# EAGLE board MasterMind_dll (EAGLE 7.1.0)
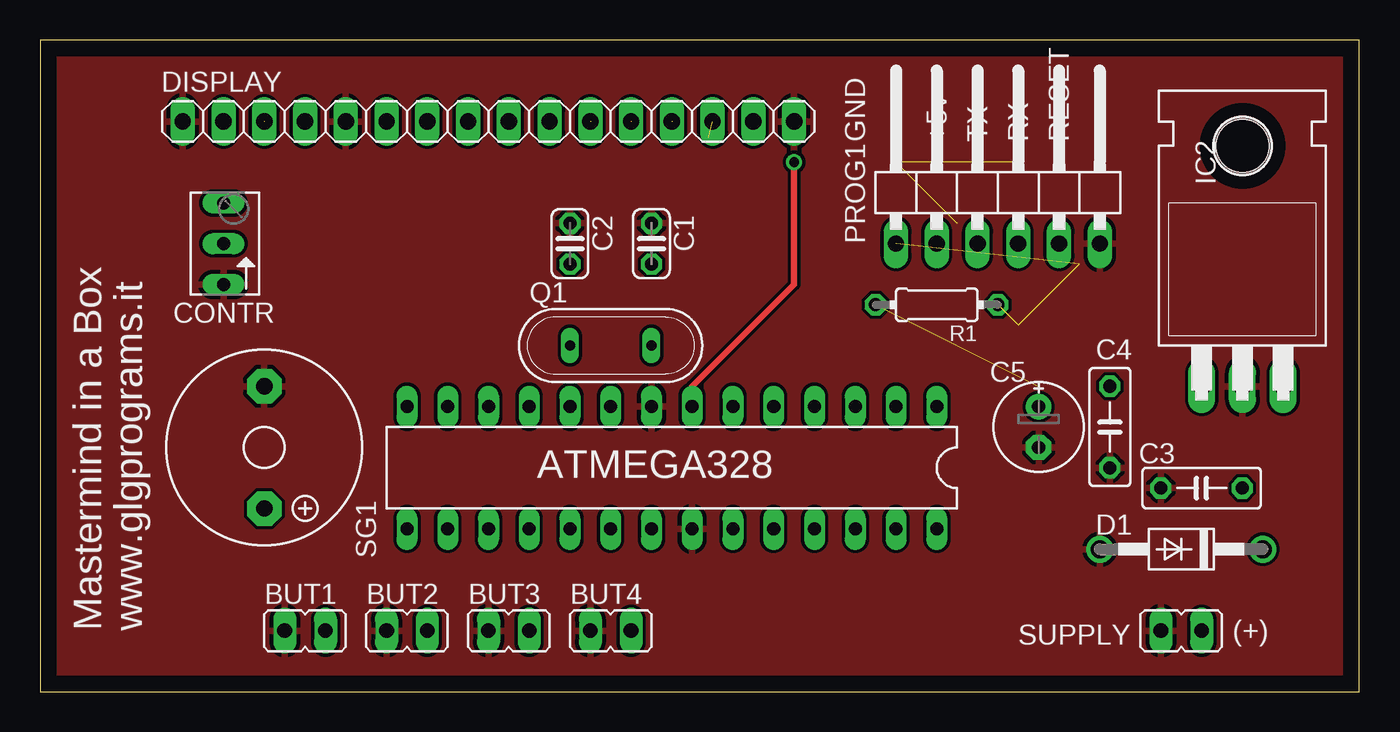
[diagram p0: board, top side]
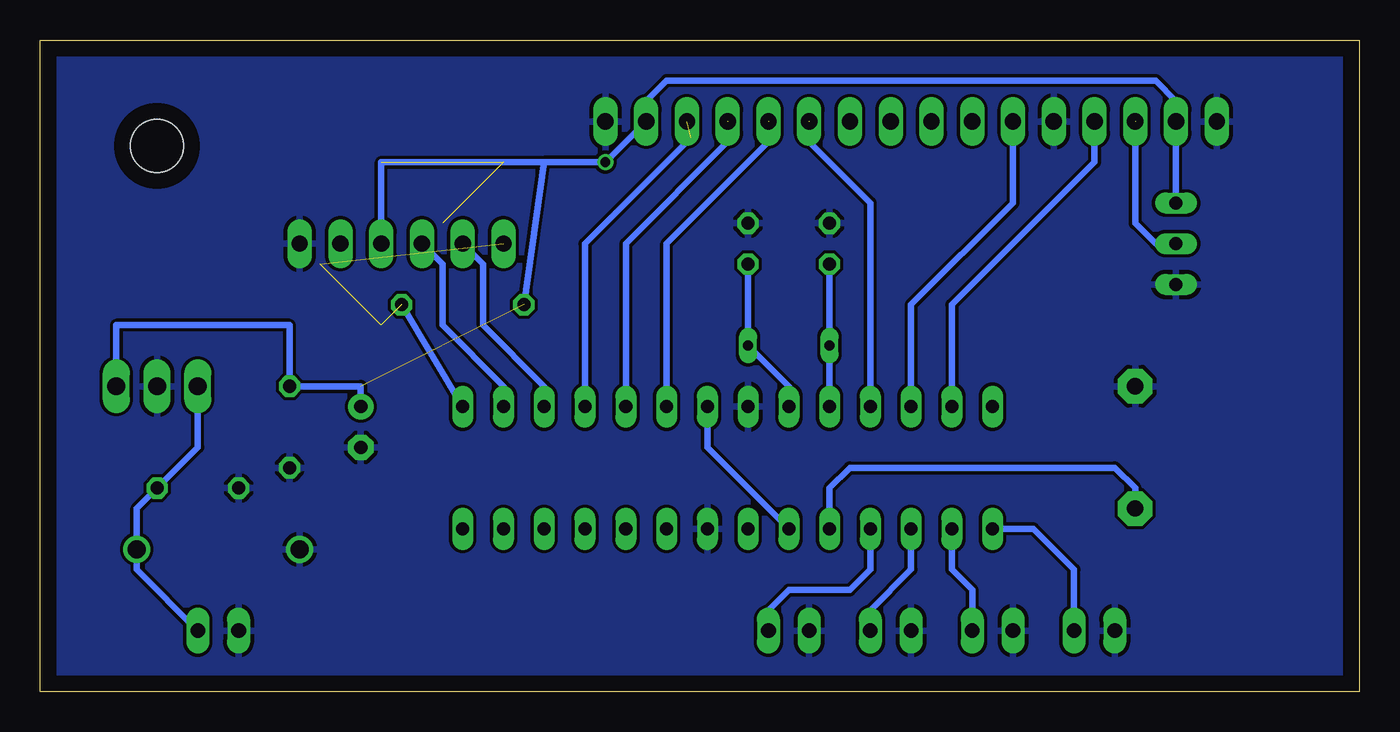
[diagram p1: board, bottom side, seen from below]

Size 82.22 x 40.63 mm. Coordinates in mm from the lower left corner, seen from the top.
Outline: 0,0 82.22,0 82.22,40.63 0,40.63 0,0
Copper layers (1*16): Top 0.035mm / dielectric 1.5mm / Bottom 0.035mm
Design rules "default": minimum track width 10mil, minimum drill 24mil, track to track 8mil, track to pad 8mil, pad to pad 8mil, via to via 8mil, smd to smd 8mil, copper to edge 40mil, drill to drill 8mil, minimum pad ring 10mil, minimum via ring 8mil, stop-mask expansion 4mil, vias tented up to drill 0mil, thermal gap 10mil

## Footprints (pad centres in the part's own frame; a part is rotated, then mirrored left to right if it is on the bottom)
DIL28-3 = drill 0.813 long: 1 -16.51,-3.81; 2 -13.97,-3.81; 3 -11.43,-3.81; 4 -8.89,-3.81; 5 -6.35,-3.81; 6 -3.81,-3.81; 7 -1.27,-3.81; 8 1.27,-3.81; 9 3.81,-3.81; 10 6.35,-3.81; 11 8.89,-3.81; 12 11.43,-3.81; 13 13.97,-3.81; 14 16.51,-3.81; 15 16.51,3.81; 16 13.97,3.81; 17 11.43,3.81; 18 8.89,3.81; 19 6.35,3.81; 20 3.81,3.81; 21 1.27,3.81; 22 -1.27,3.81; 23 -3.81,3.81; 24 -6.35,3.81; 25 -8.89,3.81; 26 -11.43,3.81; 27 -13.97,3.81; 28 -16.51,3.81
JP1 = drill 0.914 long: 1 0,-1.27; 2 0,1.27
C025-024X044 = drill 0.813 octagon: 1 -1.27,0; 2 1.27,0
C050-025X075 = drill 0.813 octagon: 1 -2.54,0; 2 2.54,0
E2,5-6E = drill 0.813 pad 1.575: + -1.27,0 | drill 0.813 pad 1.575 octagon: - 1.27,0
B64Y = drill 0.813 long: A 2.54,0; E -2.54,0; S 0,0
DO41-10 = drill 1.118: A 5.08,0; C -5.08,0
1X16 = drill 1.016 long: 1 -19.05,0; 2 -16.51,0; 3 -13.97,0; 4 -11.43,0; 5 -8.89,0; 6 -6.35,0; 7 -3.81,0; 8 -1.27,0; 9 1.27,0; 10 3.81,0; 11 6.35,0; 12 8.89,0; 13 11.43,0; 14 13.97,0; 15 16.51,0; 16 19.05,0
TO220H = drill 1.118 long: 1 -2.54,-10.16; 2 0,-10.16; 3 2.54,-10.16 | hole 3.302: 0,4.826
1X06/90 = drill 1.016 long: 1 -6.35,-3.81; 2 -3.81,-3.81; 3 -1.27,-3.81; 4 1.27,-3.81; 5 3.81,-3.81; 6 6.35,-3.81
QS = drill 0.61 long: 1 -2.54,0; 2 2.54,0
0204/7 = drill 0.813 octagon: 1 -3.81,0; 2 3.81,0
F/TMB = drill 1.016 pad 2.159 octagon: + 3.81,0; - -3.81,0

## Placement (x,y rotation side)
ATMEGA328  ATMEGA168-20P  [DIL28-3]  39.37,13.97 180 top
BUT1  [JP1]  16.51,3.81 270 top
BUT2  [JP1]  22.86,3.81 270 top
BUT3  [JP1]  29.21,3.81 270 top
BUT4  [JP1]  35.56,3.81 270 top
C1  22p  [C025-024X044]  38.1,27.94 270 top
C2  22p  [C025-024X044]  33.02,27.94 270 top
C3  [C050-025X075]  72.39,12.7 180 top
C4  [C050-025X075]  66.67,16.51 270 top
C5  [E2,5-6E]  62.23,16.51 270 top
CONTR  [B64Y]  11.43,27.94 90 top
D1  1N4004  [DO41-10]  71.12,8.89 180 top
DISPLAY  [1X16]  27.94,35.56 0 top
IC2  7805T  [TO220H]  74.93,29.21 0 top
PROG1  [1X06/90]  59.69,31.75 0 top
Q1  16M  [QS]  35.56,21.59 0 top
R1  [0204/7]  55.88,24.13 180 top
SG1  F/TMB  [F/TMB]  13.97,15.24 270 top
SUPPLY  [JP1]  71.12,3.81 270 top

## Library data of the parts
ATMEGA328 = adafruit
BUT1-BUT4 SUPPLY = jumper
C1 C2 = resistor; SPICEPREFIX: C
C3-C5 = rcl
CONTR = pot
D1 = diode
DISPLAY PROG1 = pinhead
IC2 = linear
Q1 = special
R1 = resistor
SG1 = buzzer; OC_FARNELL: unknown; OC_NEWARK: unknown

## Nets
+5V: ATMEGA328.7 ATMEGA328.20 C4.1 C5.+ CONTR.A DISPLAY.2 DISPLAY.15 IC2.3 PROG1.4 R1.2
CONTR: CONTR.S DISPLAY.3
D4: ATMEGA328.11 DISPLAY.11
D5: ATMEGA328.6 DISPLAY.12
D6: ATMEGA328.5 DISPLAY.13
D7: ATMEGA328.4 DISPLAY.14
ENABLE: ATMEGA328.12 DISPLAY.6
GND: ATMEGA328.8 ATMEGA328.22 BUT1.1 BUT2.1 BUT3.1 BUT4.1 C1.1 C2.1 C3.2 C4.2 C5.- CONTR.E D1.A DISPLAY.1 DISPLAY.5 DISPLAY.16 IC2.2 PROG1.6 SG1.- SUPPLY.1
N$1: ATMEGA328.10 C2.2 Q1.1
N$2: ATMEGA328.9 C1.2 Q1.2
N$3: ATMEGA328.19 SG1.+
N$4: ATMEGA328.18 BUT4.2
N$5: ATMEGA328.17 BUT3.2
N$6: ATMEGA328.16 BUT2.2
N$7: ATMEGA328.15 BUT1.2
N$10: C3.1 D1.C IC2.1 SUPPLY.2
RESET: ATMEGA328.1 PROG1.1 R1.1
RS: ATMEGA328.13 DISPLAY.4
RX: ATMEGA328.3 PROG1.2
TX: ATMEGA328.2 PROG1.3

## Tracks (layer width: path | path; a pad name or v marks a point on that pad's centre or on a via)
+5V  (via drill 0.6)  (3 unrouted)
  Top 0.406: ATMEGA328.7 40.64,19.05 46.99,25.4 v46.99,33.02
  Bottom 0.406: ATMEGA328.20 40.64,15.24 ATMEGA328.7 | 44.2,35.81 DISPLAY.15 | DISPLAY.15 v46.99,33.02 50.8,33.02 | CONTR.A DISPLAY.2 11.43,36.83 12.7,38.1 43.18,38.1 44.45,36.83 DISPLAY.15 | C5.+ 62.23,19.05 C4.1 66.67,22.86 77.47,22.86 IC2.3 | PROG1.4 60.96,33.02 50.8,33.02 | R1.2 50.8,33.02
CONTR  (1 unrouted)
  Bottom 0.406: CONTR.S 12.7,27.94 13.97,29.21 DISPLAY.3
D4  (1 unrouted)
  Bottom 0.406: ATMEGA328.11 30.48,30.48 34.29,34.29 DISPLAY.11
D5  (1 unrouted)
  Bottom 0.406: ATMEGA328.6 43.18,27.94 36.83,34.29 DISPLAY.12
D6  (1 unrouted)
  Bottom 0.406: ATMEGA328.5 45.72,27.94 39.37,34.29 DISPLAY.13
D7  (1 unrouted)
  Bottom 0.406: 41.66,34.54 48.26,27.94 ATMEGA328.4
ENABLE
  Bottom 0.406: ATMEGA328.12 27.94,24.13 21.59,30.48 DISPLAY.6
GND
  pour Top: 0,1.27 0,40.64 82.55,40.64 82.55,0 0,0
  pour Bottom: 0,0 0,40.64 82.55,40.64 82.55,0
N$1
  Bottom 0.406: ATMEGA328.10 Q1.1 C2.2
N$2
  Bottom 0.406: C1.2 Q1.2 35.56,19.05 ATMEGA328.9
N$3
  Bottom 0.406: ATMEGA328.19 33.02,12.7 31.75,13.97 15.24,13.97 13.97,12.7 SG1.+
N$4
  Bottom 0.406: BUT4.2 36.83,5.08 35.56,6.35 31.75,6.35 30.48,7.62 ATMEGA328.18
N$5
  Bottom 0.406: BUT3.2 30.48,5.08 27.94,7.62 ATMEGA328.17
N$6
  Bottom 0.406: BUT2.2 24.13,6.35 25.4,7.62 ATMEGA328.16
N$7
  Bottom 0.406: BUT1.2 17.78,7.62 20.32,10.16 ATMEGA328.15
N$10
  Bottom 0.406: SUPPLY.2 76.2,7.62 D1.C 76.2,11.43 C3.1 72.39,15.24 IC2.1
RESET  (3 unrouted)
  Bottom 0.406: ATMEGA328.1 R1.1
RS
  Bottom 0.406: ATMEGA328.13 25.4,24.13 16.51,33.02 DISPLAY.4
RX
  Bottom 0.406: ATMEGA328.3 50.8,19.05 54.61,22.86 54.61,26.67 PROG1.2
TX
  Bottom 0.406: ATMEGA328.2 53.34,19.05 57.15,22.86 57.15,26.67 PROG1.3

## Text on the board
tPlace: Mastermind in a Box | www.glgprograms.it
tNames: GND | +5v | TX | RX | RESET | (+)